# Altium PCB PCB_2020-04-19 01_20_00.pcbdoc
Units mil, origin at the board's own origin, x right, y up, seen from the top; angles counter-clockwise.
Board outline 2300 x 1870 mil, 2 copper layers (Top Layer, Bottom Layer); 3 components, 4 nets, 8 pads, 0 vias.
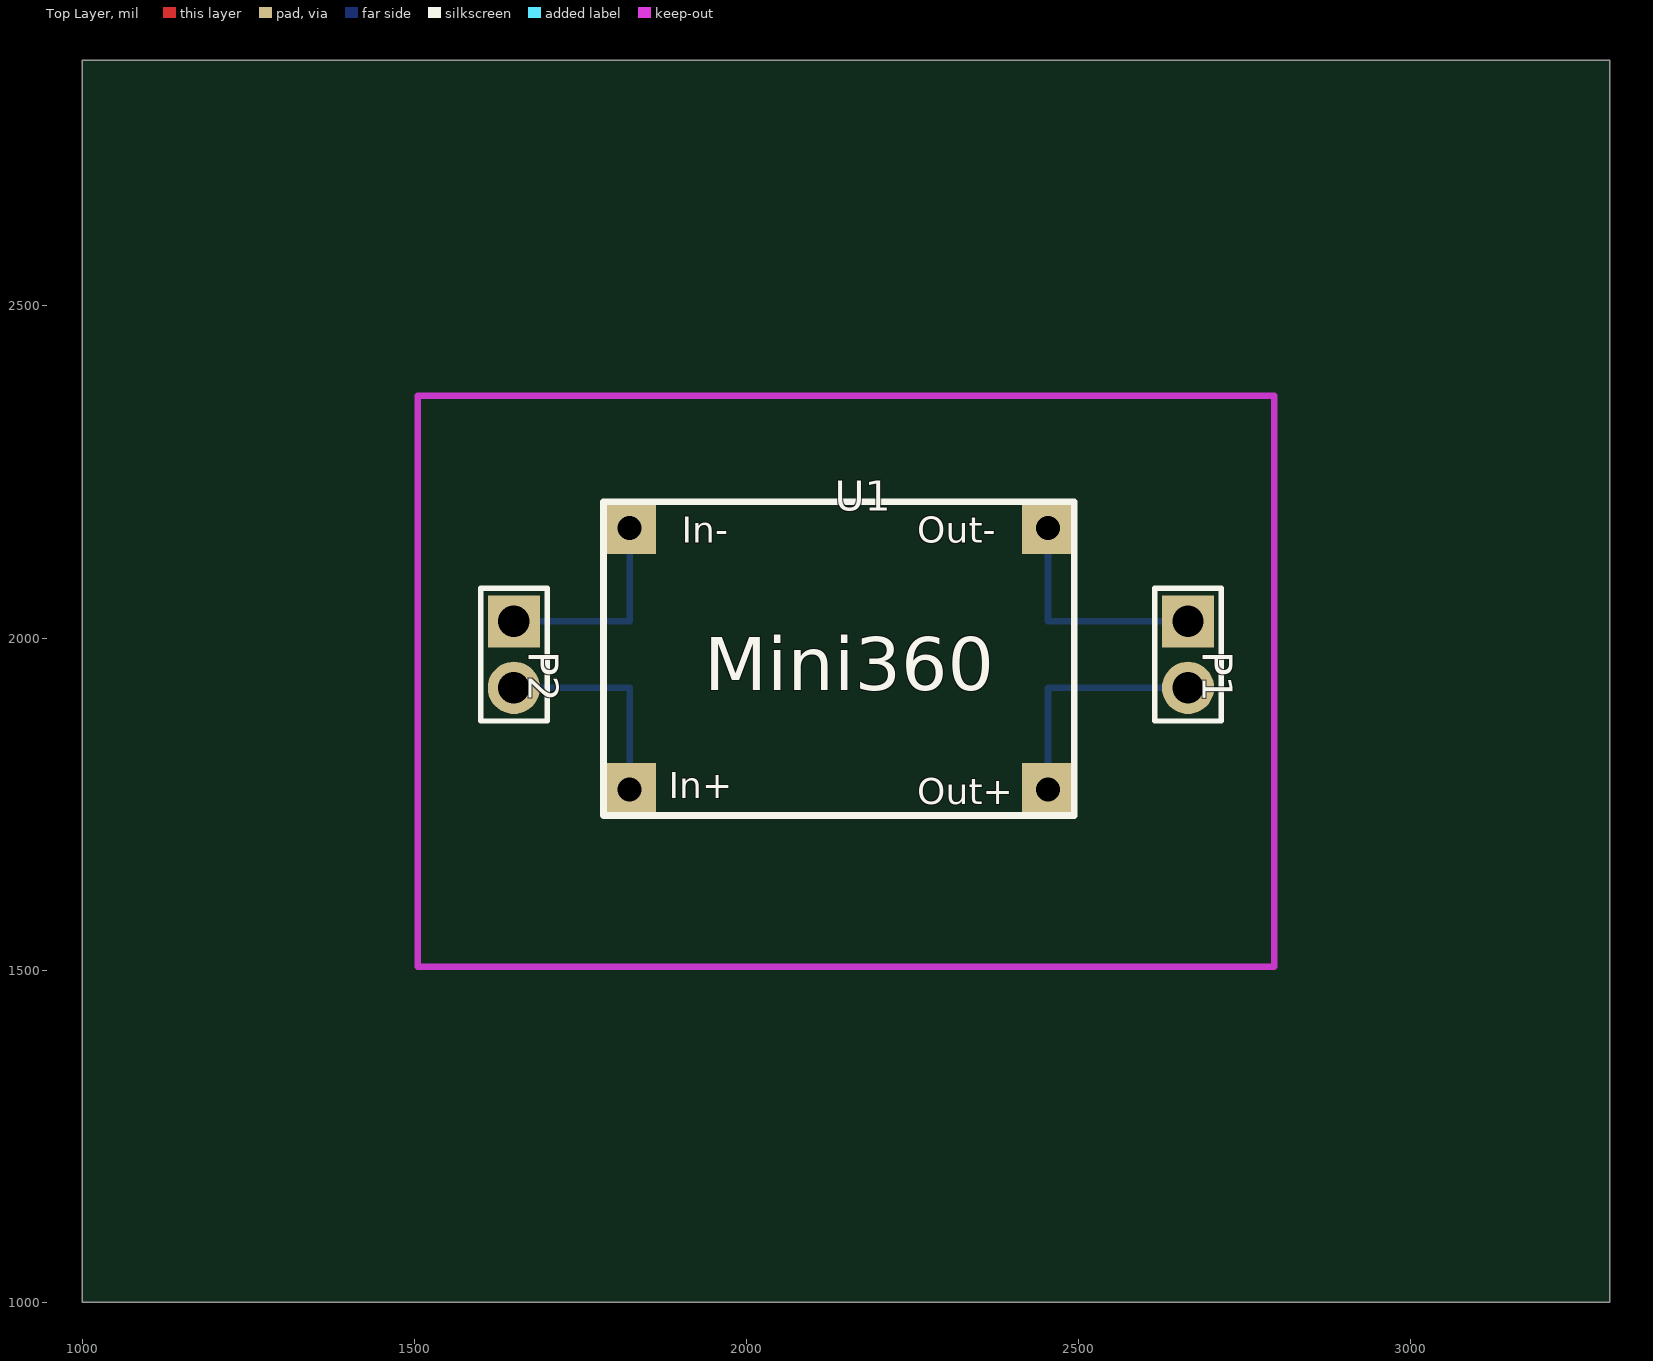
[diagram p0: Top Layer view]
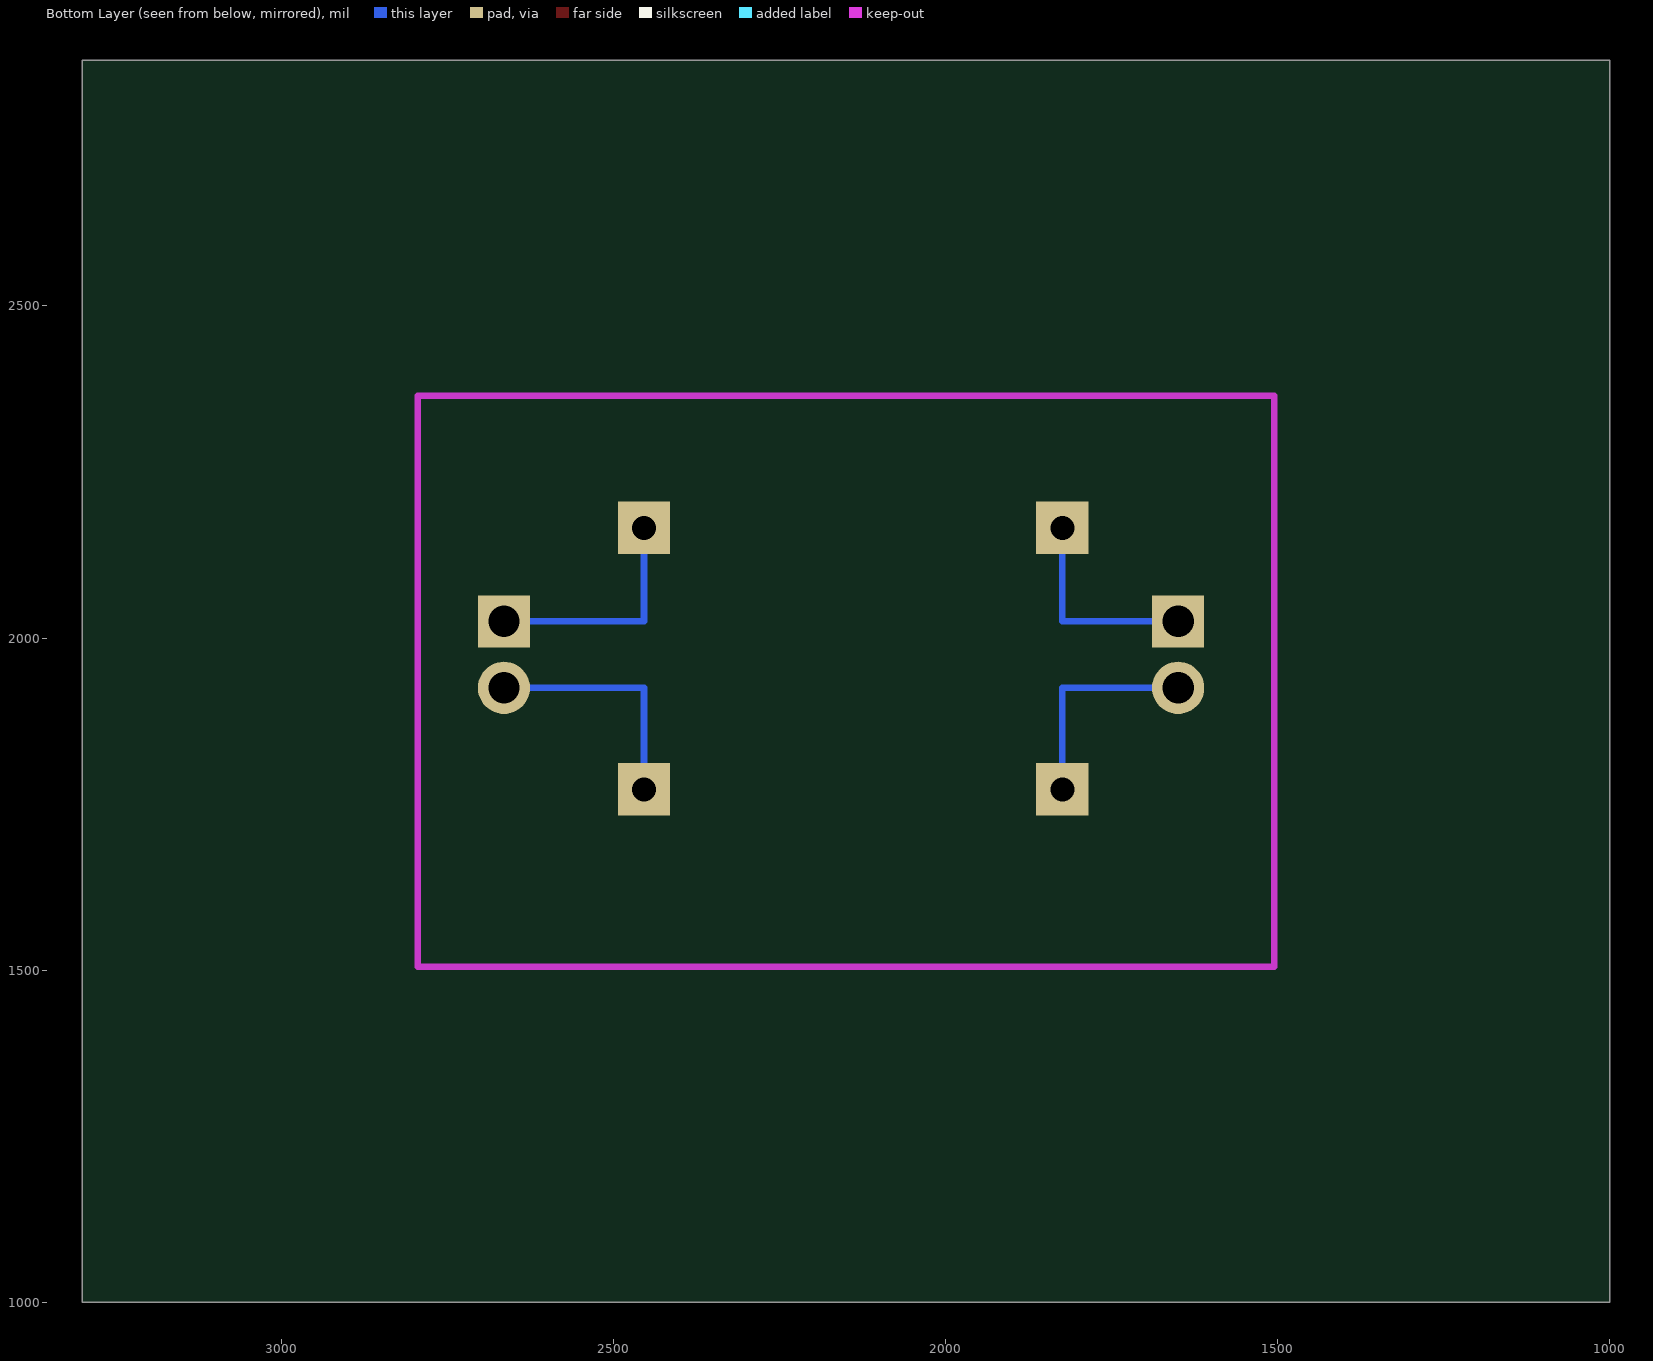
[diagram p1: Bottom Layer view, seen from below]

## Layer stack, top to bottom
Top Layer: signal copper (thickness not stored)
Dielectric: dielectric 12.6, FR-4, Dk 4.8
Bottom Layer: signal copper (thickness not stored)

## Board outline
3300,1000 1000,1000 1000,2870 3300,2870

## Components (designator, comment, footprint, x,y, rotation, side; value= is the part's Value field where it differs from the comment)
P1 "Header-Female-2.54_1x2" HDR-TH_2P-P2.54-V-M 2665,1975 r270 top
P2 "Header-Female-2.54_1x2" HDR-TH_2P-P2.54-V-M 1650,1975 r270 top
U1 "MINI360BUCK" MINI360BUCK 1785,2205 r0 top

## Footprints (in the part's own frame and the unit in brackets; to place one, negate y for a bottom-side part, rotate by r counter-clockwise, add the part's x,y. Pads: shape width x height; smd on the part's side, far side on the other; paste and mask are expansions set on the pad)
HDR-TH_2P-P2.54-V-M [mm]
  rect 2x2 hole 1.2: 1(-1.27,0)
  round 2 hole 1.2: 2(1.27,0)
  silkscreen extent -2.54,-1.27 2.54,1.27
MINI360BUCK [mil]
  rect 78.8x78.8 hole 35.98: 1(39.29,-39.21) 2(39.29,-432.91) 3(669.21,-39.21) 4(669.21,-432.91)
  silkscreen extent 0,-472 709,0

## Nets (pads, with @x,y where several pads share a name; then routed paths per layer and width w, separated by ;. In a path a pad name is that pad's centre, name@x,y a point inside that pad or via, vN(x,y) a via of type N, cw(c..) or ccw(c..) an arc to the next point about the centre after c; other vN are vias at no path point)
U1_1: P2.1 U1.1 | length 315.1
  Bottom Layer w10: P2.1 1824.29,2025 U1.1
U1_2: P2.2 U1.2 | length 327.2
  Bottom Layer w10: P2.2 1824.29,1925 U1.2
U1_3: P1.1 U1.3 | length 351.6
  Bottom Layer w10: U1.3 2454.21,2025 P1.1
U1_4: P1.2 U1.4 | length 363.7
  Bottom Layer w10: U1.4 2454.21,1925 P1.2

## Silkscreen, mask and mechanical layers (free items; w line width, h text height)
Document:
  lines w0.1: 2149,1934 2151,1936

## Text inside footprints (layer, text, board x,y; h text height)
U1: Top Overlay "In-" at 1903.03,2143.41 h39.37; Top Overlay "In+" at 1883.31,1758.64 h39.37; Top Overlay "Out+" at 2257.36,1749.69 h39.37; Top Overlay "Out-" at 2257.36,2143.41 h39.37; Top Overlay "Mini360" at 1936.35,1921.73 h80